# EAGLE board Backup (EAGLE 9.3.2)
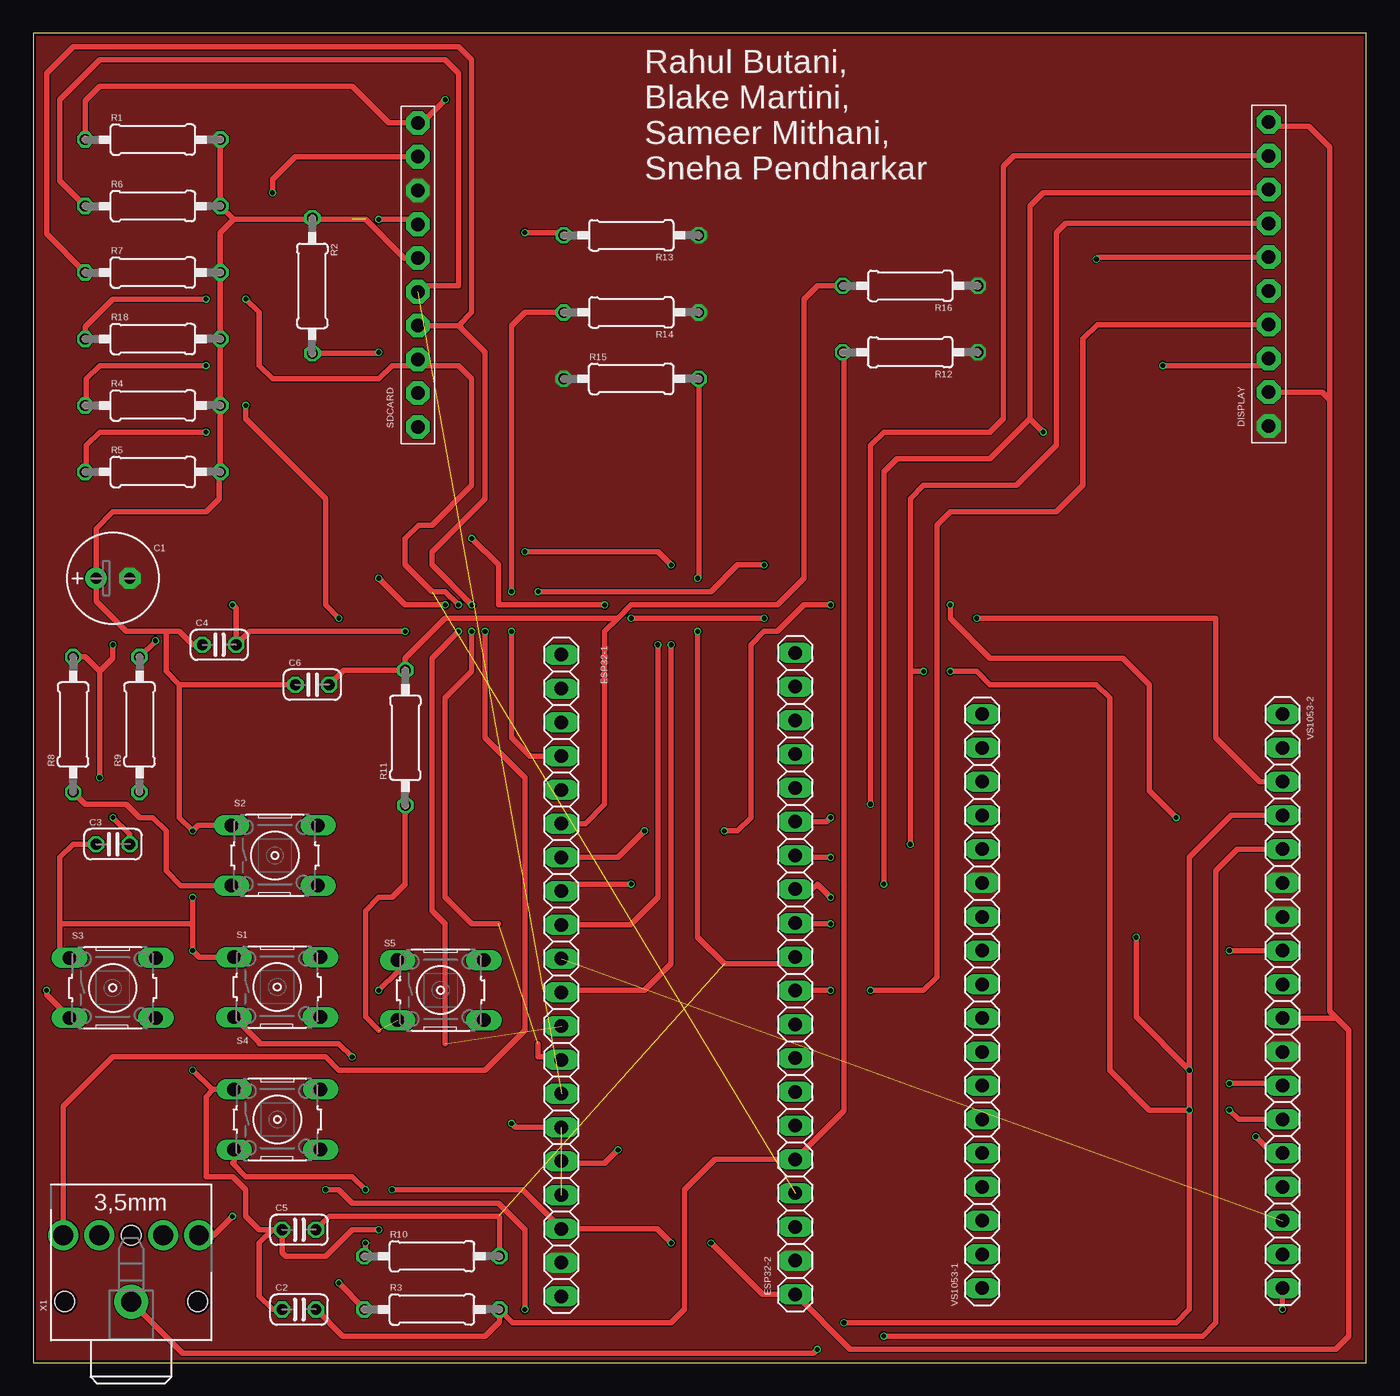
[diagram p0: board, top side]
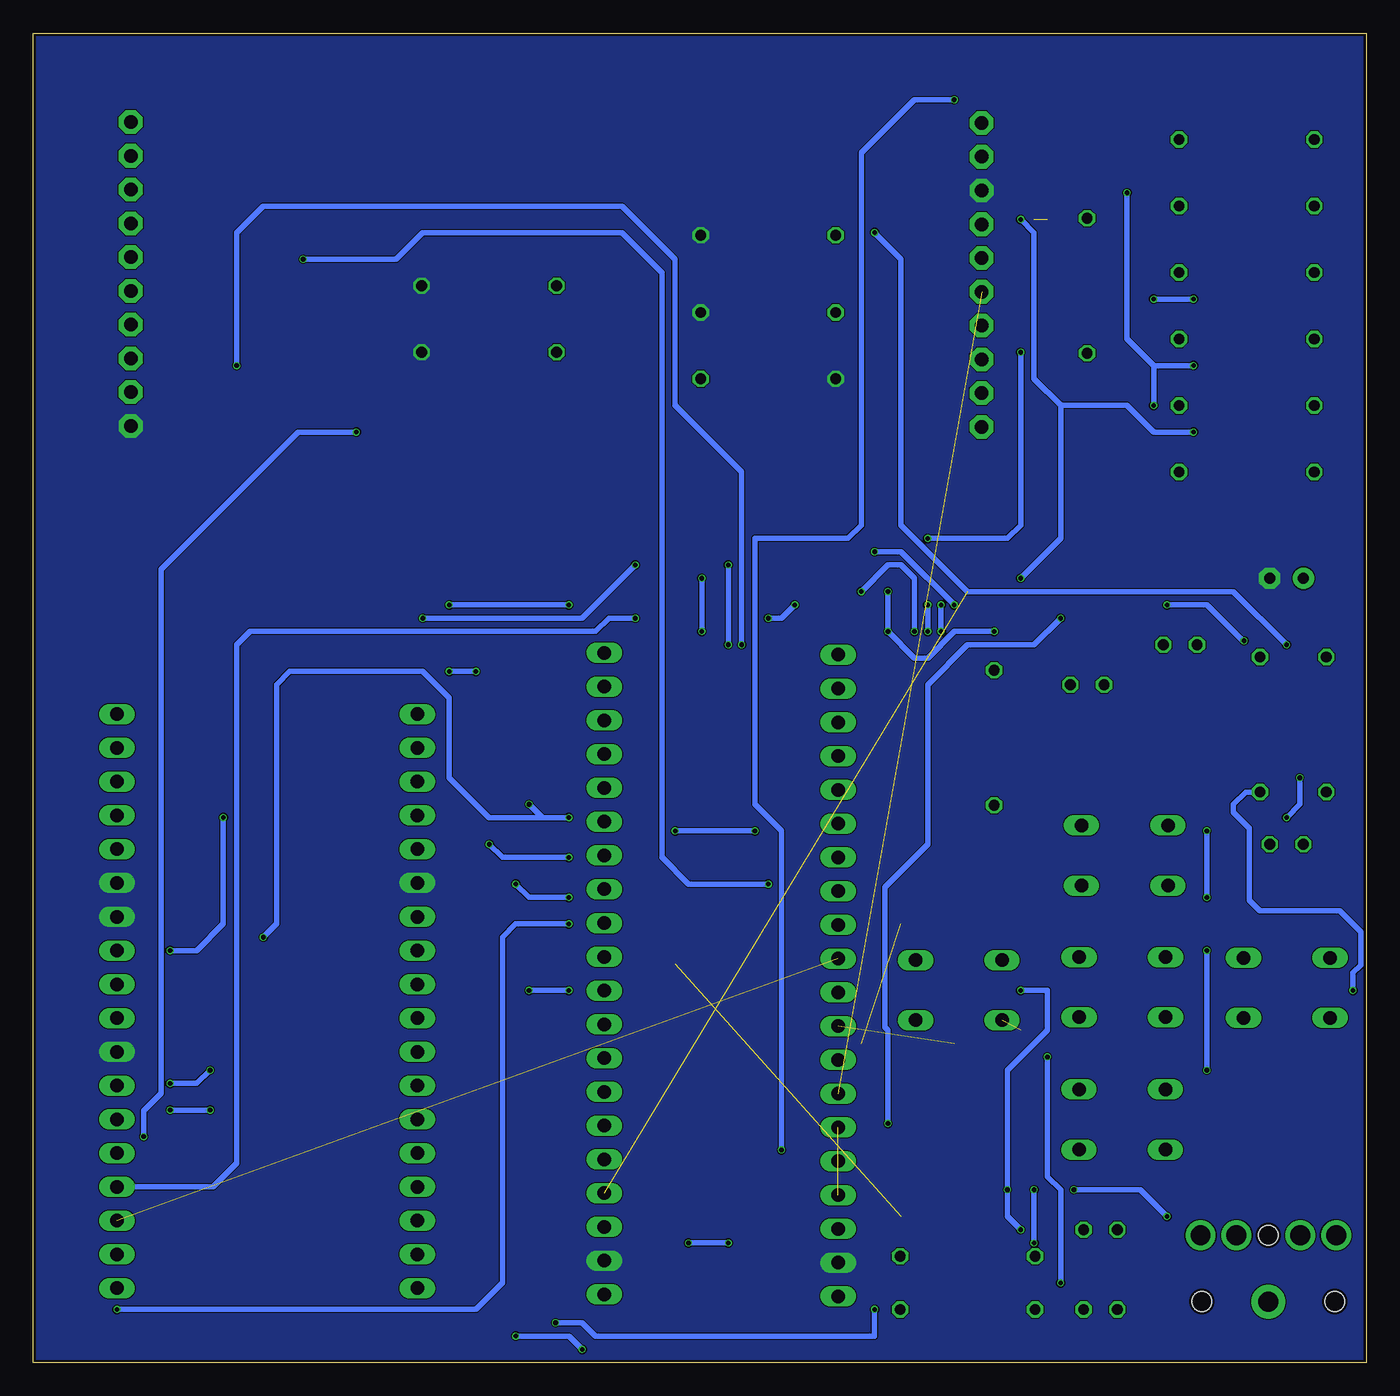
[diagram p1: board, bottom side, seen from below]

Size 100.31 x 100 mm. Coordinates in mm from the lower left corner, seen from the top.
Outline: 0,0 100.31,0 100.31,100 0,100 0,0
Copper layers (1*16): Top 0.035mm / dielectric 1.5mm / Bottom 0.035mm
Design rules "jlcpcb *": minimum track width 3.5mil, minimum drill 0.2mm, track to track 3.5mil, track to pad 3.5mil, pad to pad 6mil, via to via 6mil, smd to smd 6mil, copper to edge 0.2mm, drill to drill 0.2mm, minimum pad ring 3mil, minimum via ring 3mil, stop-mask expansion 4mil, vias tented up to drill 0mil, thermal gap 10mil

## Footprints (pad centres in the part's own frame; a part is rotated, then mirrored left to right if it is on the bottom)
E2,5-7 = drill 0.813 pad 1.6: + -1.27,0 | drill 0.813 pad 1.6 octagon: - 1.27,0
C025-024X044 = drill 0.813 octagon: 1 -1.27,0; 2 1.27,0
1X10-BIG = drill 1.016 pad 1.778 octagon: 1 -11.43,0; 2 -8.89,0; 3 -6.35,0; 4 -3.81,0; 5 -1.27,0; 6 1.27,0; 7 3.81,0; 8 6.35,0; 9 8.89,0; 10 11.43,0
1X20 = drill 1.016 long: 1 -24.13,0; 2 -21.59,0; 3 -19.05,0; 4 -16.51,0; 5 -13.97,0; 6 -11.43,0; 7 -8.89,0; 8 -6.35,0; 9 -3.81,0; 10 -1.27,0; 11 1.27,0; 12 3.81,0; 13 6.35,0; 14 8.89,0; 15 11.43,0; 16 13.97,0; 17 16.51,0; 18 19.05,0; 19 21.59,0; 20 24.13,0
0207/10 = drill 0.813 octagon: 1 -5.08,0; 2 5.08,0
B3F-10XX = drill 1.016 long: 1 -3.251,2.261; 2 3.251,2.261; 3 -3.251,-2.261; 4 3.251,-2.261
1X18 = drill 1.016 long: 1 -21.59,0; 2 -19.05,0; 3 -16.51,0; 4 -13.97,0; 5 -11.43,0; 6 -8.89,0; 7 -6.35,0; 8 -3.81,0; 9 -1.27,0; 10 1.27,0; 11 3.81,0; 12 6.35,0; 13 8.89,0; 14 11.43,0; 15 13.97,0; 16 16.51,0; 17 19.05,0; 18 21.59,0
STX3100 = drill 1.5 pad 2.54: 1 2.7,-0.1 | drill 1.5: 2 7.7,5; 3 7.7,2.3; 4 7.7,-2.5; 5 7.7,-5.2 | hole 1.5: 2.7,4.9; 2.7,-5.1; 7.7,-0.1

## Placement (x,y rotation side)
C1  50uF  [E2,5-7]  6,59 0 top
C2  0.5uF  [C025-024X044]  20,4 0 top
C3  0.5uF  [C025-024X044]  6,39 0 top
C4  0.5uF  [C025-024X044]  14,54 0 top
C5  0.5uF  [C025-024X044]  20,10 0 top
C6  0.5uF  [C025-024X044]  21,51 0 top
DISPLAY  PINHD-1X10  [1X10-BIG]  92.97,81.89 90 top
ESP32-1  [1X20]  39.74,29.12 270 top
ESP32-2  [1X20]  57.34,29.26 90 top
R1  10k  [0207/10]  9,92 0 top
R2  100k  [0207/10]  21,81 270 top
R3  10k  [0207/10]  30,4 0 top
R4  10k  [0207/10]  9,72 0 top
R5  10k  [0207/10]  9,67 0 top
R6  10k  [0207/10]  9,87 0 top
R7  10k  [0207/10]  9,82 0 top
R8  10k  [0207/10]  3,48 90 top
R9  10k  [0207/10]  8,48 90 top
R10  10k  [0207/10]  30,8 0 top
R11  10k  [0207/10]  28,47 90 top
R12  330  [0207/10]  66,76 180 top
R13  330  [0207/10]  45,84.8 180 top
R14  330  [0207/10]  45,79 180 top
R15  330  [0207/10]  45,74 0 top
R16  330  [0207/10]  66,81 180 top
R18  10k  [0207/10]  9,77 0 top
S1  [B3F-10XX]  18.36,28.25 0 top
S2  [B3F-10XX]  18.18,38.15 0 top
S3  [B3F-10XX]  5.98,28.19 0 top
S4  [B3F-10XX]  18.37,18.29 0 top
S5  [B3F-10XX]  30.66,28.02 0 top
SDCARD  PINHD-1X10  [1X10-BIG]  28.94,81.82 90 top
VS1053-1  [1X18]  71.41,27.19 90 top
VS1053-2  [1X18]  94.01,27.19 270 top
X1  STEREOJACK  [STX3100]  7.27,1.89 90 top

## Library data of the parts
C1-C6 = rcl; SPICEPREFIX: C
DISPLAY ESP32-1 ESP32-2 SDCARD VS1053-1 VS1053-2 X1 = adafruit
R1-R16 R18 = rcl; SPICEPREFIX: R
S1-S5 = switch-omron; MPN: B3F-1000; OC_FARNELL: 176432; OC_NEWARK: 36M3542

## Nets
5V: ESP32-1.20
CLK: ESP32-1.1
DISPLAY_CS: DISPLAY.6 ESP32-1.8
DISPLAY_RST: DISPLAY.3 ESP32-1.9
DREQ: ESP32-1.7 VS1053-2.8
EN: ESP32-2.3
FCLK: ESP32-2.18
FSD1: ESP32-2.20
FSD3: ESP32-2.19
GND: C1.- DISPLAY.1 ESP32-1.19 ESP32-2.2 R12.1 R13.1 R14.1 R15.1 R16.1 SDCARD.8 VS1053-1.13 VS1053-2.6 VS1053-2.7 VS1053-2.11
I2C_SCL: ESP32-2.16
I2C_SDA: ESP32-2.17
IO2: ESP32-1.15 ESP32-1.17 R4.1 SDCARD.9
IO4: ESP32-1.16 R1.1 SDCARD.10
IO9: DISPLAY.4 ESP32-2.10
IO10: C5.2 ESP32-2.11 R10.2 R15.2
IO12: ESP32-1.12 R18.1 SDCARD.3
IO13: ESP32-1.13 R7.1 SDCARD.4
IO14: ESP32-1.11 R5.1 SDCARD.7
IO15: ESP32-1.14 R6.1 SDCARD.5
IO25: C6.2 ESP32-1.6 R11.2 R16.2
IO34: ESP32-2.6
IO35: ESP32-2.7
IO37: C3.2 ESP32-2.4 R8.2 R13.2
IO38: C2.2 ESP32-2.5 R3.2 R12.2
N$1: VS1053-1.9
N$2: VS1053-1.1
N$3: VS1053-1.2
N$4: VS1053-1.3
N$5: VS1053-1.4
N$6: VS1053-1.5
N$7: VS1053-1.6
N$8: VS1053-1.7
N$9: VS1053-1.8
N$10: VS1053-1.10
N$11: VS1053-1.11
N$12: VS1053-1.12
N$13: VS1053-2.4 X1.5
N$14: VS1053-1.14
N$15: VS1053-1.15
N$16: VS1053-1.16
N$17: VS1053-2.3 X1.2
N$18: VS1053-2.17
N$19: R3.1 S1.3
N$20: R2.2 VS1053-2.15
N$21: VS1053-2.5 X1.1
N$22: R8.1 S2.3
N$23: R9.1 S3.3
N$24: R10.1 S4.3
N$25: R11.1 S5.3
N$26: VS1053-2.9
RX0: ESP32-2.9
SD0: ESP32-1.2
SD2: ESP32-1.3
SPI_CLK: DISPLAY.8 ESP32-2.13 VS1053-2.14
SPI_MISO: DISPLAY.9 ESP32-2.15 VS1053-2.12
SPI_MOSI: DISPLAY.7 ESP32-2.14 VS1053-2.13
SVN: ESP32-1.5
SVP: C4.2 ESP32-1.4 R9.2 R14.2
TX0: ESP32-2.8
V3P3: C1.+ C2.1 C3.1 C4.1 C5.1 C6.1 DISPLAY.2 DISPLAY.10 ESP32-1.18 ESP32-2.1 R1.2 R2.1 R4.2 R5.2 R6.2 R7.2 R18.2 S1.1 S2.1 S3.1 S4.1 S5.1 SDCARD.6 VS1053-2.10
VS_CMD_CS: ESP32-1.10 VS1053-2.16
VS_DATA_CS: ESP32-2.12 VS1053-2.18

## Tracks (layer width: path | path; a pad name or v marks a point on that pad's centre or on a via)
DISPLAY_CS  (via drill 0.35)
  Top 0.4: DISPLAY.6 80.16,83.16 v80,83 | v45,36 40.27,36 ESP32-1.8
  Bottom 0.4: v80,83 73,83 71,85 56,85 53,82 53,38 51,36 v45,36
DISPLAY_RST  (via drill 0.35)
  Top 0.4: ESP32-1.9 44.93,32.93 47,35 v47,54 | v85,75 92.43,75 DISPLAY.3
  Bottom 0.4: v47,54 47,67 52,72 52,83 56,87 83,87 85,85 v85,75
DREQ  (via drill 0.35)
  Top 0.4: VS1053-2.8 v90,31 | v86,41 84,43 84,51 82,53 72,53 69,56 v69,57 | ESP32-1.7 44.01,38.01 v46,40 | v52,40 53,40 54,41 54,54 55,55 56,55 58,57 v60,57
  Bottom 0.4: v90,31 88,31 86,33 v86,41 | v46,40 v52,40 | v60,57 v69,57
GND
  pour Top (rank 2, no thermals): 0,100 100.2,100 100.2,0 0,0
  pour Bottom (rank 2, no thermals): 0,100 100.2,100 100.2,0 0,0
IO2  (via drill 0.35)  (1 unrouted)
  Top 0.4: R4.1 4,72.08 4,74 5,75 v13,75 | v18,88 18,89 19.71,90.71 SDCARD.9 | v16,72 16,71 22,65 22,57 v23,56 | v36,18 36.31,17.69 ESP32-1.15
  Bottom 0.4: v13,75 16,75 | 16,75 18,77 v18,88 | 16,75 v16,72 | v23,56 25,54 30,54 33,51 33,39 36.23,35.77 36.23,25.22 36,24.99 v36,18
IO4  (via drill 0.35)
  Top 0.4: R1.1 3.92,94.92 5,96 24,96 26.75,93.25 SDCARD.10 29.25,93.25 v31,95 | v44,16 43,15 39.89,15 ESP32-1.16
  Bottom 0.4: v31,95 34,95 38,91 38,63 39,62 46,62 46,42 44,40 v44,16
IO9  (via drill 0.35)
  Top 0.4: DISPLAY.4 80.08,78.08 79,77 79,66 77,64 69,64 68,63 68,29 67,28 v63,28 | v60,28 ESP32-2.10
  Bottom 0.4: v63,28 v60,28
IO10  (via drill 0.35)  (1 unrouted)
  Top 0.4: R10.2 35.08,10.92 35,11 22.27,11 C5.2 | R15.2 50.08,59.08 v50,59 | v50,55 50,32 52,30 | 52,30 57,30 57.34,30.34 ESP32-2.11 | 52,30
  Bottom 0.4: v50,59 v50,55
IO12  (via drill 0.35)  (1 unrouted)
  Top 0.4: R18.1 3.92,77.92 6,80 v13,80 | v16,80 17,79 17,75 18,74 26,74 27,75 28.47,75 SDCARD.3 29.41,75 32,75 33,74 33,66 30,63 29,63 28,62 28,60 30,58 31,58 v32,57 | v32,55 30,53 30,34 31,33 31,24
  Bottom 0.4: v13,80 v16,80 | v32,57 v32,55
IO13  (via drill 0.35)  (1 unrouted)
  Top 0.4: R7.1 1,84.92 1,97 3,99 32,99 33,98 33,79 32,78 | 32,78 31.99,78.01 SDCARD.4 | 32,78 34,76 34,65 30,61 30,60 v33,57 | v33,55 33,52 31,50 31,35 33,33 35,33 | ESP32-1.13 39.51,23 38,23 38,24
  Bottom 0.4: v33,57 v33,55
IO14  (via drill 0.35)
  Top 0.4: R5.1 4,67.08 4,69 5,70 v13,70 | SDCARD.7 28.57,86 v26,86 | ESP32-1.11 39.89,28 46,28 48,30 v48,54 | v48,60 47,61 v37,61 | v31,57 28,57 v26,59
  Bottom 0.4: v13,70 16,70 18,72 23,72 | 23,72 25,74 25,85 v26,86 | 23,72 23,62 v26,59 | v48,54 v48,60 | v37,61 35,61 v31,57
IO15  (1 unrouted)
  Top 0.4: R6.1 2,88.92 2,95 5,98 31,98 32,97 32,81 29.39,81 SDCARD.5
IO25
  Top 0.4: R16.2 59,81 58,80 58,59 56,57 45,57 44,56 | ESP32-1.6 41.55,40.55 43,42 43,55 44,56 | C6.2 23.35,52.08 R11.2 28,53 31,56 44,56
IO37  (via drill 0.35)  (1 unrouted)
  Top 0.4: R8.2 3.92,53.08 5,52 | 5,52 v5,44 | v6,41 7.27,39.73 C3.2 | 5,52 6,53 v6,54 | v37,85 39.72,85 R13.2
  Bottom 0.4: v5,44 5,42 v6,41 | v6,54 10,58 30,58 35,63 35,83 v37,85
IO38
  Top 0.4: C2.2 23.27,2 34,2 35.08,3.08 R3.2 36.08,3 48,3 49,4 49,13 51.29,15.29 ESP32-2.5 61,18.95 61,75.92 R12.2
N$13  (via drill 0.35)
  Top 0.4: X1.5 13.59,9.59 v15,11 | v22,13 23,13 24,12 35,12 37,10 v37,4 | v61,3 86,3 87,4 87,38 90.16,41.16 VS1053-2.4
  Bottom 0.4: v15,11 17,13 v22,13 | v37,4 37,2 58,2 59,3 v61,3
N$17  (via drill 0.35)
  Top 0.4: X1.2 2.27,19.27 6,23 22,23 23,22 34,22 37,25 37,44 34,47 v34,55 | VS1053-2.3 92.3,43.7 89,47 89,56 v71,56 | v55,60 53,60 51,58 v38,58
  Bottom 0.4: v34,55 34,59 35,60 36,60 v38,58 | v71,56 59,56 v55,60
N$19  (via drill 0.35)
  Top 0.4: R3.1 v23,6 | S1.3 17,24.1 17,24 23,24 v24,23
  Bottom 0.4: v23,6 23,13 24,14 v24,23
N$20  (via drill 0.35)
  Top 0.4: R2.2 25.92,75.92 v26,76 | v33,62 35,60 35,57 v43,57 | v45,56 v55,56
  Bottom 0.4: v26,76 26,63 27,62 v33,62 | VS1053-2.15 86.78,13.22 85,15 85,54 84,55 58,55 57,56 v55,56 | v43,57 44,56 v45,56
N$21  (via drill 0.35)
  Top 0.4: X1.1 11.26,0.7 58.7,0.7 v59,1 | v64,2 88,2 89,3 89,37 90.62,38.62 VS1053-2.5
  Bottom 0.4: v59,1 60,2 v64,2
N$22
  Top 0.4: R8.1 3.92,42 7,42 8,41 9,41 10,40 10,37 11.11,35.89 S2.3
N$23  (via drill 0.35)
  Top 0.4: v1,28 1,27.66 S3.3
  Bottom 0.4: R9.1 9.08,42.92 10,42 10,41.4 8.8,40.2 8.8,34.8 8,34 2,34 0.41,32.41 0.41,29.91 1,29.32 v1,28
N$24  (via drill 0.35)
  Top 0.4: R10.1 25,8.08 v25,9 | v25,13 24,14 16,14 15,15 15.12,15.12 S4.3
  Bottom 0.4: v25,9 v25,13
N$25  (1 unrouted)
  Top 0.4: R11.1 28,36 27,35 26,35 25,34 25,26 26,25
SPI_CLK  (via drill 0.35)
  Top 0.4: DISPLAY.8 92.73,88 76,88 75,87 75,71 | v64,36 64,67 65,68 72,68 75,71 | v60,35 59,36 58.61,35.61 ESP32-2.13 | VS1053-2.14 93.24,15.76 v92,17 | v76,70 75,71
  Bottom 0.4: v64,36 63,35 v60,35 | v92,17 92,18.95 90.69,20.26 90.69,59.69 80.38,70 v76,70
SPI_MISO  (via drill 0.35)
  Top 0.4: DISPLAY.9 73.78,90.78 73,90 73,71 72,70 64,70 63,69 v63,42 | v60,41 59.69,40.69 ESP32-2.15 | v83,32 83,26 v87,22 | v90,21 93.85,21 VS1053-2.12
  Bottom 0.4: v63,42 62,41 | 62,41 v60,41 | 62,41 66,41 69,44 69,50 71,52 81,52 82,51 82,33 v83,32 | v87,22 88,21 v90,21
SPI_MOSI  (via drill 0.35)
  Top 0.4: DISPLAY.7 77.7,85.7 77,85 77,69 74,66 67,66 66,65 66,52 | 66,52 v66,39 | v60,38 57.49,38 ESP32-2.14 | 66,52 v67,52 | v69,52 71,52 72,51 80,51 81,50 81,22 84,19 v87,19 | v90,19 90.7,18.3 VS1053-2.13
  Bottom 0.4: v66,39 65,38 v60,38 | v67,52 v69,52 | v87,19 v90,19
SVP  (via drill 0.35)
  Top 0.4: R14.2 37,79 36,78 v36,58 | v36,55 36,47 37.37,45.63 ESP32-1.4 | R9.2 9.2,54.28 v9.2,54.3 | v15,57 15.27,56.73 C4.2 16.27,55 v28,55
  Bottom 0.4: v36,58 v36,55 34,53 33,53 31,55 v28,55 | v9.2,54.3 9.3,54.3 12,57 v15,57
V3P3  (via drill 0.35)  (1 unrouted)
  Top 0.152: 23.92,86.08 24,86
  Top 0.4: SDCARD.6 27.91,83.09 25,86 21.08,86 R2.1 20.92,86 15.08,86 | 15.08,86 R6.2 R1.2 | 15.08,86 14.08,85 R7.2 R18.2 R4.2 R5.2 14,66.92 14,65 13,64 6,64 4.73,62.73 C1.+ 4.73,57.27 7,55 10,55 | C2.1 18,4 17,5 17,9 18,10 | 18,10 C5.1 18.73,8.27 19,8 22,8 24,10 v26,10 | C3.1 3,39 2,38 2,33 | S3.1 2,31.18 2,33 | 10,55 11,55 12,54 C4.1 | 98.08,25.92 VS1053-2.10 | 98.08,25.92 99,25 99,2 98,1 61.47,1 ESP32-2.1 54.87,5.13 v51,9 | 98.08,25.92 97.58,26.42 97.58,72.42 | 18,10 17,10 16,11 16,13 15,14 13,14 13,20 13.55,20.55 S4.1 13.45,20.55 v12,22 | 97.58,72.42 97,73 DISPLAY.2 | DISPLAY.10 93.29,93 96,93 97.58,91.42 97.58,72.42 | 12,33 2,33 | 12,33 v12,31 12.49,30.51 S1.1 | S2.1 12.41,40.41 v12,40 11,41 11,51 | v12,35 12,33 | C6.1 11,51 | 11,51 10,52 10,55 | v48,9 46.93,10.07 ESP32-1.18 36.81,13 v27,13 | v26,28 27.41,29.41 S5.1
  Bottom 0.4: v12,22 v12,31 | v12,40 v12,35 | v48,9 v51,9 | v26,10 27,11 v27,13 27,22 24,25 24,28 v26,28
VS_CMD_CS  (1 unrouted)
VS_DATA_CS  (via drill 0.35)
  Top 0.4: ESP32-2.12 57.41,33 v60,33 | VS1053-2.18 v94,4
  Bottom 0.4: v60,33 64,33 65,32 65,6 67,4 v94,4

## Text on the board
tPlace: Rahul Butani, / Blake Martini, / Sameer Mithani, / Sneha Pendharkar